# EAGLE board riffle-0.4lp (EAGLE 7.2.0)

Size 102.67 x 18.03 mm. Coordinates in mm from the lower left corner, seen from the top.
Outline: 102.27,18.01 0,18.03 0,0.02 102.67,0
Outline: 102.2,0.02 102.2,18.03
Copper layers (1*16): Top 0.035mm / dielectric 1.5mm / Bottom 0.035mm
Design rules "Fusion_eagle_rule_v1.1 *": minimum track width 6mil, minimum drill 12mil, track to track 6mil, track to pad 6mil, pad to pad 6mil, via to via 6mil, smd to smd 0mil, copper to edge 10mil, drill to drill 10mil, minimum pad ring 10mil, minimum via ring 6mil, stop-mask expansion 2mil, vias tented up to drill 100mil, thermal gap 25mil

## Footprints (pad centres in the part's own frame; a part is rotated, then mirrored left to right if it is on the bottom)
BATTCON_12MM_SMT = smd 2.4 x 4.3: P$1 0,11.96 | smd 2.4 x 4.2: P$2 0,-4.1 | hole 0.95: 0,7.5 | hole 1.25: 0,0
SOT-23 = smd 0.787 x 0.889: 1 0.025,-1.016; 2 -0.94,1.016; 3 0.991,1.016
C0805K = smd 1.1 x 1.4: 1 -1,0; 2 1,0
C0805 = smd 1.3 x 1.5: 1 -0.85,0; 2 0.85,0
CHIPLED_0805 = smd 1.2 x 1.2: A 0,-1.05; C 0,1.05
JST-PH-2-SMT-RA = smd 1 x 4.6: 1 1,-3.7; 2 -1,-3.7 | smd 1.6 x 3.4: NC1 -3.4,1.5; NC2 3.4,1.5
R0805 = smd 1.3 x 1.5: 1 -0.95,0; 2 0.95,0
TQFP32-08 = smd 1.27 x 0.559: 1 -4.293,2.8; 2 -4.293,2; 3 -4.293,1.2; 4 -4.293,0.4; 5 -4.293,-0.4; 6 -4.293,-1.2; 7 -4.293,-2; 8 -4.293,-2.8; 17 4.293,-2.8; 18 4.293,-2; 19 4.293,-1.2; 20 4.293,-0.4; 21 4.293,0.4; 22 4.293,1.2; 23 4.293,2; 24 4.293,2.8 | smd 0.559 x 1.27: 9 -2.8,-4.293; 10 -2,-4.293; 11 -1.2,-4.293; 12 -0.4,-4.293; 13 0.4,-4.293; 14 1.2,-4.293; 15 2,-4.293; 16 2.8,-4.293; 25 2.8,4.293; 26 2,4.293; 27 1.2,4.293; 28 0.4,4.293; 29 -0.4,4.293; 30 -1.2,4.293; 31 -2,4.293; 32 -2.8,4.293
SOT23-5 = smd 0.55 x 1.2: 1 -0.95,-1.3; 2 0,-1.3; 3 0.95,-1.3; 4 0.95,1.3; 5 -0.95,1.3; 6 0,1.3
SO16 = smd 0.6 x 1.2: 1 -4.445,-2.8; 2 -3.175,-2.8; 3 -1.905,-2.8; 4 -0.635,-2.8; 5 0.635,-2.8; 6 1.905,-2.8; 7 3.175,-2.8; 8 4.445,-2.8; 9 4.445,2.8; 10 3.175,2.8; 11 1.905,2.8; 12 0.635,2.8; 13 -0.635,2.8; 14 -1.905,2.8; 15 -3.175,2.8; 16 -4.445,2.8
SOT89 = smd 0.58 x 1.2: 1 -1.5,-1.8; 2 0,-1.8; 3 1.5,-1.8 | smd 2 x 2: 4 0,1.3
SO-08 = smd 0.6 x 2.2: 1 -1.905,-2.6; 2 -0.635,-2.6; 3 0.635,-2.6; 4 1.905,-2.6; 5 1.905,2.6; 6 0.635,2.6; 7 -0.635,2.6; 8 -1.905,2.6
2X03 = drill 1.016 octagon: 1 -2.54,-1.27; 2 -2.54,1.27; 3 0,-1.27; 4 0,1.27; 5 2.54,-1.27; 6 2.54,1.27
AYZ0202 = smd 1 x 1.15: 1 -2.5,2.825; 2 0,2.825; 3 2.5,2.825; 4 -2.5,-2.825; 5 0,-2.825; 6 2.5,-2.825 | hole 0.85: 1.5,0; -1.5,0
1X02 = drill 1.016 long: 1 -1.27,0; 2 1.27,0
1X04-SMD = smd 1 x 3: 1 -3.81,5; 2 -1.27,5; 3 1.27,5; 4 3.81,5 | hole 1.4: -2.54,0; 2.54,0
1X07 = drill 1.016 pad 1.88: 1 0,0; 2 2.54,0; 3 5.08,0; 4 7.62,0; 5 10.16,0; 6 12.7,0; 7 15.24,0
R0805' = smd 1.1 x 1.4: 1 -1,0; 2 1,0
DS3231 = smd 0.762 x 2.286: 1 -4.445,-5.08; 2 -3.175,-5.08; 3 -1.905,-5.08; 4 -0.635,-5.08; 5 0.635,-5.08; 6 1.905,-5.08; 7 3.175,-5.08; 8 4.445,-5.08; 9 4.445,5.08; 10 3.175,5.08; 11 1.905,5.08; 12 0.635,5.08; 13 -0.635,5.08; 14 -1.905,5.08; 15 -3.175,5.08; 16 -4.445,5.08
DM3D = smd 0.7 x 1.75: CD/DAT3 8.15,0.45; CLK 4.85,0.45; CMD 7.05,0.45; DAT0 2.65,0.45; DAT1 1.6,0.45; DAT2 9.25,0.45 | smd 0.8 x 1.5: GND1 0.05,8.15 | smd 0.8 x 1.4: GND2 11.95,8.8 | smd 1.4 x 1.5: GND3 11.65,0.55 | smd 1.3 x 1.5: GND4 0.35,0.55 | smd 1 x 1.55: SW_A 11.6,11.25 | smd 1.4 x 1: SW_B 0.35,9.65 | smd 0.7 x 2.032: VDD 5.95,0.45; VSS 3.75,0.45
RFM12B-ANTENNA = drill 0.8 pad 1.422: P$1 0,0
RFM69W-MINPADS = smd 2 x 1.27: ANA 8,-5; DIO0 -11.5,5; GND 8,-7; MISO 8,1; MOSI 8,3; NSS 8,5; SCK 8,-1; VDD -11.5,-7
USB-MINIB = smd 2.5 x 0.5: D+ 2.5,0; D- 2.5,0.8; GND 2.5,-1.6; ID 2.5,-0.8; VBUS 2.5,1.6 | smd 2.5 x 2: GND@1 -3,-4.5; GND@2 -3,4.5; GND@3 2.5,4.5; GND@4 2.5,-4.5 | hole 0.9: 0,2.2; 0,-2.2
RESONATOR-SMD = smd 0.7 x 1.7: 1 -1.2,0; 2 0,0; 3 1.2,0

## Placement (x,y rotation side)
BAT  CR1220  [BATTCON_12MM_SMT]  55.09,9.52 110 top
BATTPOWER  FDN340P  [SOT-23]  70.79,15.92 90 top
C1  10u  [C0805K]  7.59,11.12 90 top
C2  10u  [C0805K]  44.59,15.12 0 top
C3  10u  [C0805K]  40.79,1.42 180 top
C4  0.1uF  [C0805K]  80.59,15.82 270 top
C5  0.1uF  [C0805K]  44.59,16.92 180 top
C6  .1u  [C0805K]  23.79,1.52 180 top
C8  .1u  [C0805]  80.59,11.52 90 top
C9  .1u  [C0805]  81.09,4.92 0 top
C10  10u  [C0805K]  7.89,15.12 90 top
C11  .1u  [C0805K]  14.99,5.12 90 top
C12  .1u  [C0805]  80.59,7.82 90 top
CHG  0805  [CHIPLED_0805]  11.89,1.32 90 top
CN1  [JST-PH-2-SMT-RA]  3.59,4.72 90 top
I2C1  10K  [R0805]  60.39,14.62 180 top
I2C2  10K  [R0805]  60.39,16.62 0 top
IC1  ATMEGA328P  [TQFP32-08]  37.69,12.52 90 top
IC2  MCP73831  [SOT23-5]  23.89,5.12 180 top
IC3  CH340G  [SO16]  26.29,14.12 0 top
IC4  MCP1700-33  [SOT89]  35.79,2.92 180 top
IC5  24AA128SN  [SO-08]  65.59,13.72 180 top
IC6  MCP1700-33  [SOT89]  19.19,4.72 180 top
ISP  [2X03]  64.69,4.52 90 top
J1  AYZ0202  [AYZ0202]  29.49,4.12 270 top
JP1  [1X02]  1.99,15.02 90 top
JP2  [1X04-SMD]  28.69,26.32 270 bottom  (outside the outline)
JP3  [1X04-SMD]  50.29,25.42 270 bottom  (outside the outline)
JP4  [1X07]  100.49,1.22 90 top
RC  4.7K  [R0805']  15.79,1.52 0 top
RC1  10K  [R0805']  11.79,5.52 270 top
RC2  10K  [R0805']  5.39,15.12 90 top
REMOTE  FDN340P  [SOT-23]  83.49,10.92 0 top
RM1  10K  [R0805]  74.59,15.92 90 top
RM2  10K  [R0805]  77.49,15.92 90 top
RRST  10k  [R0805']  29.19,9.32 0 top
RSD1  50k  [R0805']  80.29,2.02 270 top
RSD2  50k  [R0805']  82.19,2.02 270 top
RTC  DS3231  [DS3231]  73.59,6.92 180 top
SDPWER  FDN340P  [SOT-23]  83.59,6.92 0 top
STAT  0805  [CHIPLED_0805]  2.49,10.52 270 top
U$1  MICROSD-HRS_DM3D  [DM3D]  97.89,12.52 180 top
U$3  RFM12B_ANTENNA  [RFM12B-ANTENNA]  83.69,15.02 0 top
U$5  RFM69  [RFM69W-MINPADS]  77.49,29.12 0 bottom  (outside the outline)
X1  USBSMD  [USB-MINIB]  14.79,11.82 270 top
X2  12MHz  [RESONATOR-SMD]  24.09,9.02 0 top
X3  16 MHz  [RESONATOR-SMD]  39.99,5.22 90 top

## Library data of the parts
BAT IC2 IC3 J1 X2 = SparkFunNew
BATTPOWER REMOTE SDPWER = zetex
C1-C6 C10 C11 RC RC1 RC2 RRST RSD1 RSD2 = adafruit2013
C8 C9 C12 = resistor
CHG STAT = led
CN1 IC4 IC6 = adafruit
I2C1 I2C2 RM1 RM2 = rcl
IC1 = atmel; MPN: ATMEGA8-16AU; OC_FARNELL: 9171371; OC_NEWARK: 73M8863
IC5 = microchip; MF: MICROCHIP; MPN: 24AA128-I/SN; OC_FARNELL: unknown; OC_NEWARK: 92C6842
ISP JP1 = pinhead
JP2 JP3 X1 X3 = SparkFun
JP4 = SparkFun-Connectors
RTC = _lh-library
U$1 = hrs_DM3D-SF
U$3 U$5 = LowPowerLab

## Nets
A0: IC1.23 JP4.2
A1: IC1.24
A2: IC1.25
A3: IC1.26 RM1.1 RM2.2
A4: IC1.27 IC5.5
A5: IC1.28 IC5.6
A6: IC1.19
A7: IC1.22
AREF: C5.2 IC1.20
D2: IC1.32 JP4.4
D3: IC1.1 JP4.3
D4: IC1.2
D5: IC1.9 SDPWER.3
D6: IC1.10
D7: IC1.11 U$1.CD/DAT3
D8: IC1.12 REMOTE.3
D9: IC1.13 RC2.2
D10: BATTPOWER.3 IC1.14
D+: IC3.5 X1.D+
D-: IC3.6 X1.D-
GND: BAT.P$1 C1.2 C2.2 C3.2 C4.1 C5.1 C8.1 C9.1 C10.2 C11.1 C12.1 CN1.2 IC1.3 IC1.5 IC1.21 IC2.2 IC3.1 IC4.1 IC5.1 IC5.2 IC5.3 IC5.4 IC5.7 IC6.1 ISP.6 JP1.1 JP4.1 RC.1 RM2.1 RTC.5 RTC.6 RTC.7 RTC.8 RTC.9 RTC.10 RTC.11 RTC.12 RTC.13 STAT.C U$1.GND1 U$1.GND2 U$1.GND3 U$1.GND4 U$1.SW_A U$1.SW_B U$1.VSS U$5.GND X1.GND X2.2 X3.2
MISO: IC1.16 ISP.1 U$1.DAT0 U$5.MISO
MOSI: IC1.15 ISP.4 U$1.CMD U$5.MOSI
N$1: U$3.P$1 U$5.ANA
N$2: IC1.7 X3.1
N$3: IC1.8 X3.3
N$4: C9.2 RSD1.1 RSD2.2 SDPWER.1 U$1.VDD
N$5: CHG.C IC2.1
N$6: IC2.5 RC.2
N$7: C8.2 JP4.7 REMOTE.1
N$8: C11.2 IC3.4 IC3.16 IC6.3
N$9: CHG.A RC1.1
N$11: IC3.7 X2.1
N$13: IC3.8 X2.3
N$15: BATTPOWER.1 C12.2 RM1.2
N$16: RSD1.2 U$1.DAT1
N$17: RC2.1 STAT.A
N$18: RSD2.1 U$1.DAT2
RESET: C6.1 IC1.29 ISP.5 RRST.1
RST: C6.2 IC3.14
RTC_BATT: BAT.P$2 RTC.14
RXD: IC1.30 IC3.2
SCK: IC1.17 ISP.3 U$1.CLK U$5.SCK
SCL: I2C1.2 JP4.6 RTC.16
SDA: I2C2.2 JP4.5 RTC.15
TXD: IC1.31 IC3.3
VBAT [vcc]: BATTPOWER.2 CN1.1 IC2.3 J1.2 JP1.2
VBUS [vcc]: C1.1 C10.1 IC2.4 IC6.2 ISP.2 RC1.2 X1.VBUS
VCC: C3.1 C4.2 I2C1.1 I2C2.1 IC1.4 IC1.6 IC1.18 IC4.3 IC5.8 REMOTE.2 RRST.2 RTC.2 SDPWER.2 U$5.VDD
VDD: C2.1 IC4.2 J1.1

## Tracks (layer width: path | path; a pad name or v marks a point on that pad's centre or on a via)
A0  (1 unrouted)
A3  (2 unrouted)
A4  (1 unrouted)
A5  (1 unrouted)
AREF  (1 unrouted)
D2  (1 unrouted)
D3  (1 unrouted)
D5  (1 unrouted)
D7  (1 unrouted)
D8  (1 unrouted)
D9  (1 unrouted)
D10  (1 unrouted)
D+  (1 unrouted)
D-  (1 unrouted)
GND  (49 unrouted)
MISO  (3 unrouted)
MOSI  (3 unrouted)
N$1  (1 unrouted)
N$2  (1 unrouted)
N$3  (1 unrouted)
N$4  (4 unrouted)
N$5  (1 unrouted)
N$6  (1 unrouted)
N$7  (2 unrouted)
N$8  (3 unrouted)
N$9  (1 unrouted)
N$11  (1 unrouted)
N$13  (1 unrouted)
N$15  (2 unrouted)
N$16  (1 unrouted)
N$17  (1 unrouted)
N$18  (1 unrouted)
RESET  (3 unrouted)
RST  (1 unrouted)
RTC_BATT  (1 unrouted)
RXD  (1 unrouted)
SCK  (3 unrouted)
SCL  (2 unrouted)
SDA  (2 unrouted)
TXD  (1 unrouted)
VBAT  (4 unrouted)
VBUS  (6 unrouted)
VCC  (13 unrouted)
VDD  (2 unrouted)

## Text on the board
tNames: VBAT